# Altium PCB PCB_EXP_RS485_SENC_CON.PcbDoc
Units mm, origin at the board's own origin, x right, y up, seen from the top; angles counter-clockwise.
Board outline 35 x 22 mm, 2 copper layers (Top Layer, Bottom Layer), stack 1.671 mm thick; 1 components, 4 nets, 16 pads, 0 vias.
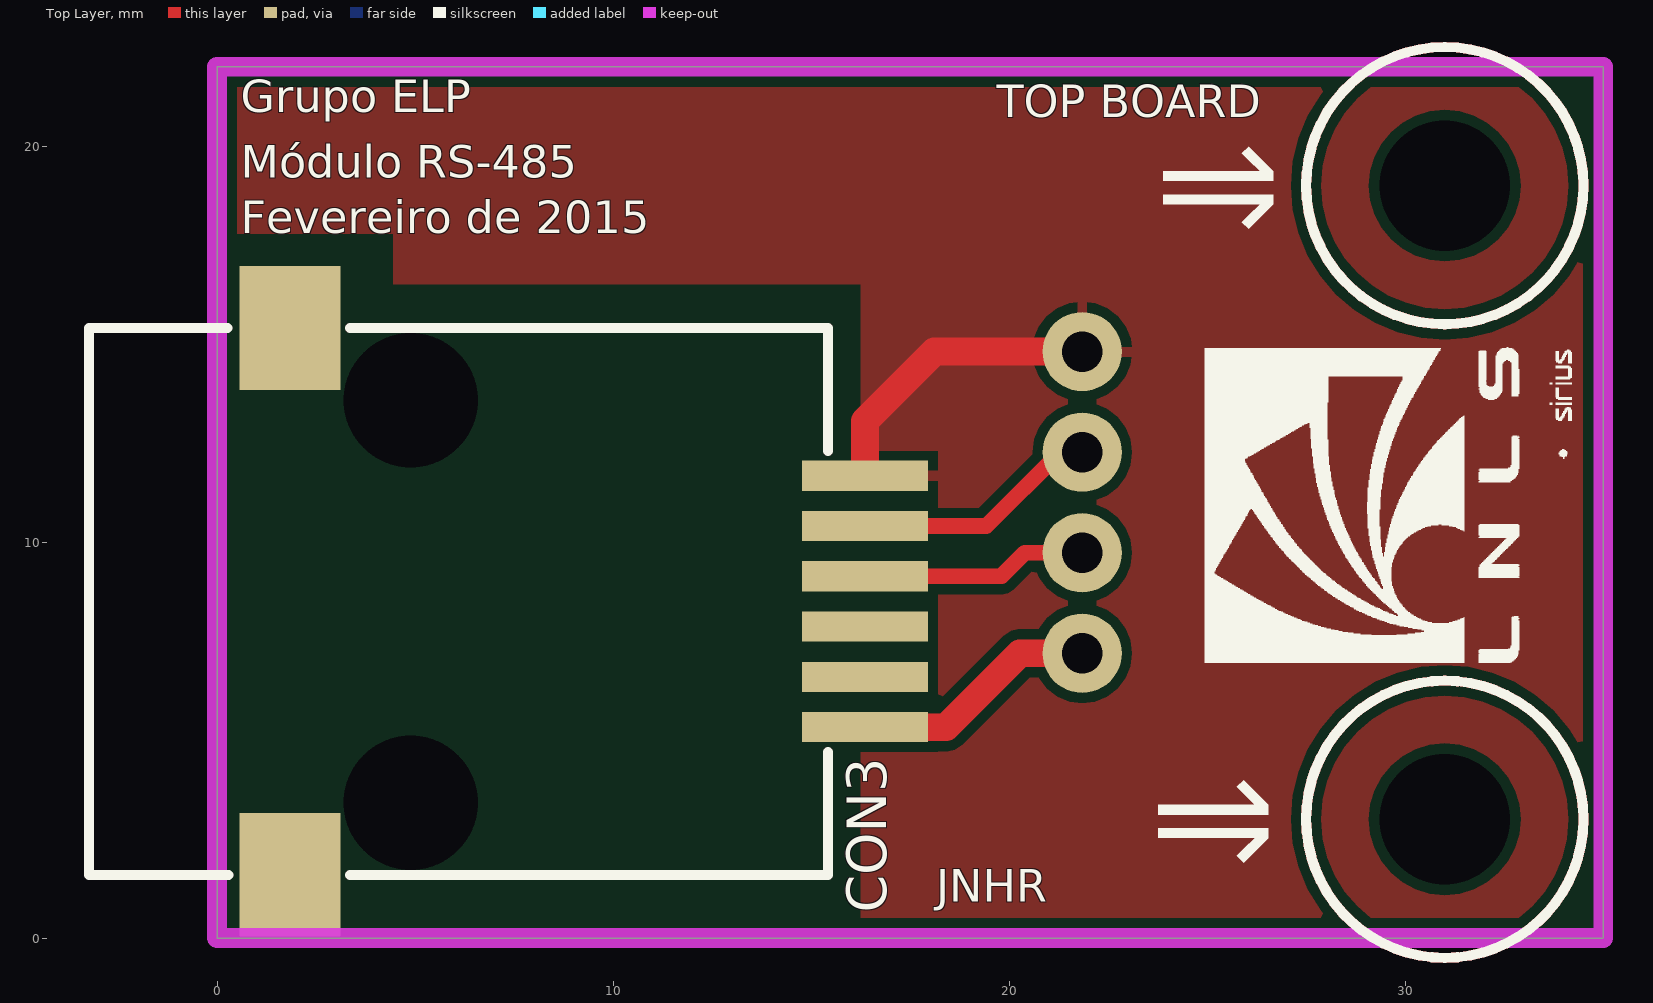
[diagram p0: Top Layer view]
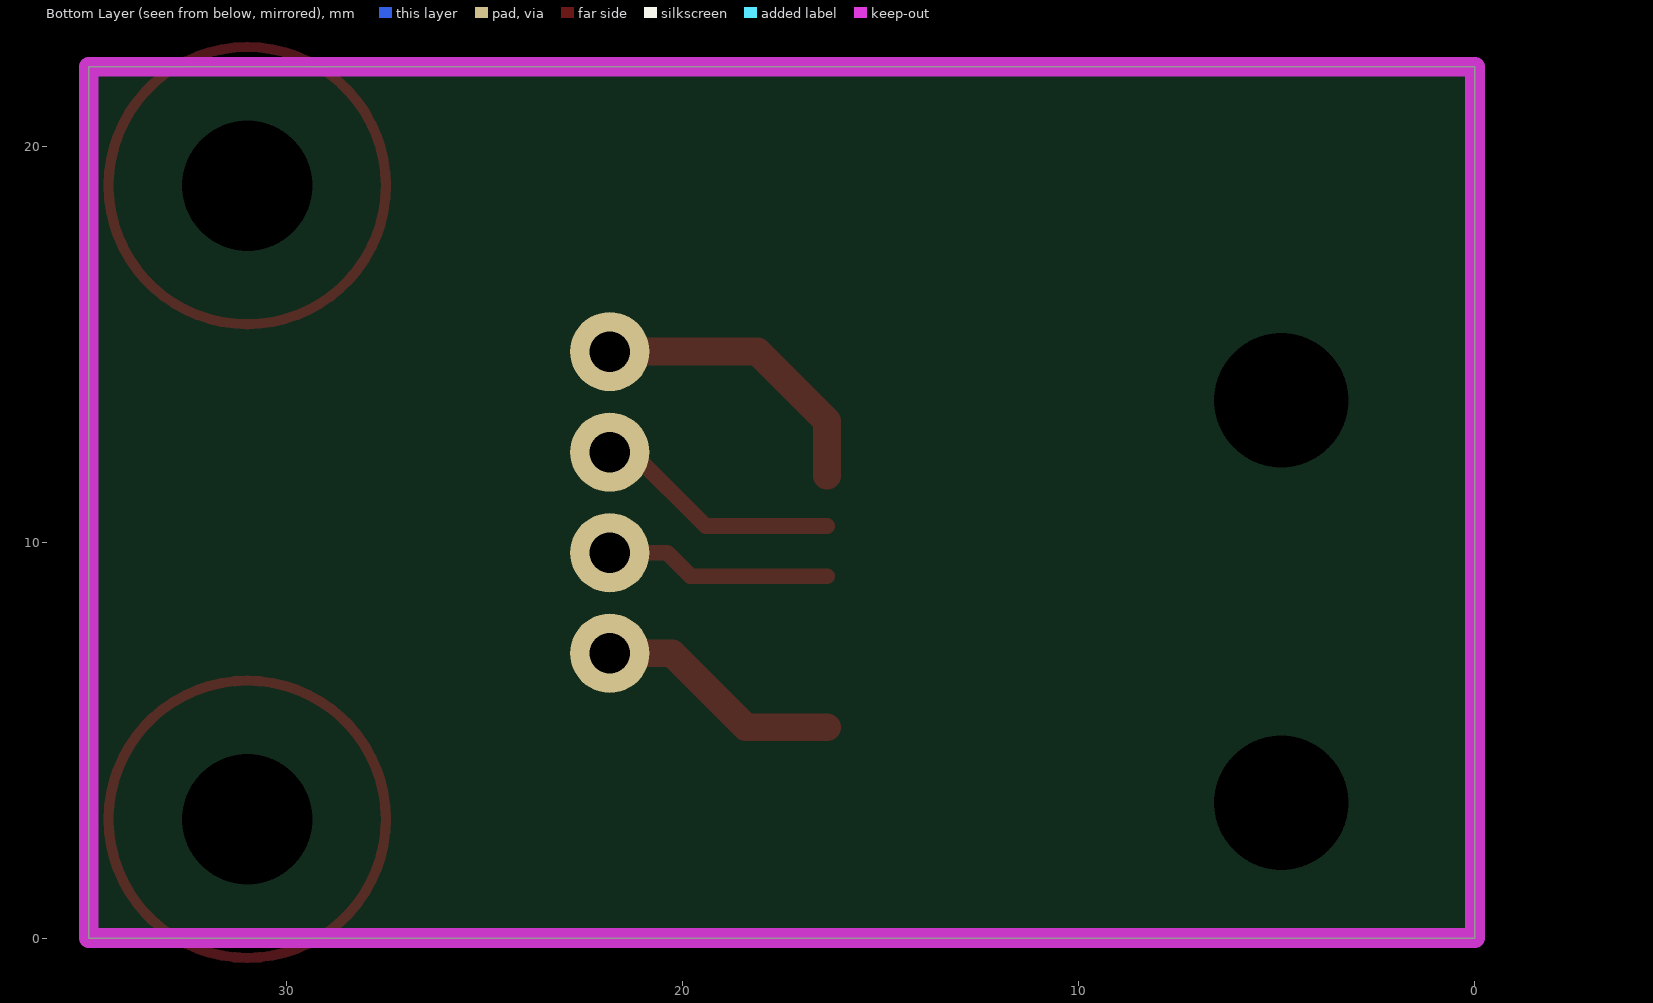
[diagram p1: Bottom Layer view, seen from below]

## Layer stack, top to bottom
Top Layer: signal copper 0.0356
Dielectric: core 1.6, FR-4, Dk 4.8
Bottom Layer: signal copper 0.0356

## Board outline
0,0 0,22 35,22 35,0

## Design rules (kind name [scope] priority, off if disabled: settings)
Clearance [All] p1: gap=0.254
PolygonConnect [All] p1: connectstyle=Relief reliefconductorwidth=0.254 reliefentries=4 polygonreliefangle="90 Angle" airgapwidth=0.254
RoutingVias [All] p1: holewidth=0.711 width=1.27 viastyle="Through Hole" minholewidth=0.711 minwidth=1.27 maxholewidth=0.711 maxwidth=1.27
SolderMaskExpansion [All] p1: expansion=0.102
Width [All] p1: maxlimit=1 minlimit=0.254 preferedwidth=0.254
28 further rules are at their usual default settings.

## Components (designator, comment, footprint, x,y, rotation, side; value= is the part's Value field where it differs from the comment)
CON3 "133719" "ERNI 133719" 9.1,8.5 r270 top locked

## Footprints (in the part's own frame and the unit in brackets; to place one, negate y for a bottom-side part, rotate by r counter-clockwise, add the part's x,y. Pads: shape width x height; smd on the part's side, far side on the other; paste and mask are expansions set on the pad)
"ERNI 133719" [mm] "RJ11 SMD com shield"
  rect 0.76x3.18 smd: 1(-3.175,7.26) 2(-1.905,7.26) 3(-0.635,7.26) 4(0.635,7.26) 5(1.905,7.26) 6(3.175,7.26)
  round 3.35 hole 3.4 unplated: S1(-5.08,-4.21) S1(5.08,-4.21)
  rect 3.12x2.54 smd: SH(-6.905,-7.26) SH(6.905,-7.26)
  silkscreen extent -6.9,-12.34 6.91,6.33, body extent -8.64,-12.34 8.69,8.63, height 13.79

## Part data
CON3: "Conector RJ11 SMD, Shielded, EMI Finger"

## Free pads (board coordinates)
  round 2 hole 1.02 unplated: 1(21.844,14.81) 2(21.844,12.27) 3(21.844,9.73) 4(21.844,7.19)
  round 0 hole 3.3 unplated: MEC(31,3) MEC(31,19)

## Nets (pads, with @x,y where several pads share a name; then routed paths per layer and width w, separated by ;. In a path a pad name is that pad's centre, name@x,y a point inside that pad or via, vN(x,y) a via of type N, cw(c..) or ccw(c..) an arc to the next point about the centre after c; other vN are vias at no path point)
GND_ISO: CON3.1 pad.1 | length 7.6
  Top Layer w0.7: CON3.1 16.36,13.058 18.112,14.81 pad.1
RS485_A: CON3.2 pad.2 | length 6.3
  Top Layer w0.4: CON3.2 19.422,10.405 21.287,12.27 pad.2
RS485_B: CON3.3 pad.3 | length 5.7
  Top Layer w0.4: CON3.3 19.803,9.135 20.398,9.73 pad.3
VDD5V_ISO: CON3.6 pad.4 | length 6.3
  Top Layer w0.7: CON3.6 18.406,5.325 20.271,7.19 pad.4
pads on no net: CON3.4 CON3.5 CON3.S1 CON3.SH
copper on no net: | length 44
  Top Layer w0.254: 34.5,3 ccw(c31,3) 34.5,3 ; 34.5,19 ccw(c31,19) 34.5,19

## Polygon pours and split planes (outlines as drawn)
GND_ISO on Top Layer "Mechanical 14-No Net" (solid): 0,22 0,17.78 3.81,17.78 4.445,17.78 4.445,16.51 16.256,16.51 16.256,9.906 16.256,0 35,0 35,22

## Keep-outs
Keep-Out Layer:
  the board outline again, w0.5

## Silkscreen, mask and mechanical layers (free items; w line width, h text height)
Top Overlay:
  drawing of 24 lines, arcs and shapes, not listed
  text "Grupo ELP" at 0.59,20.574 h1.4
  text "TOP BOARD" at 19.685,20.447 h1.4
  text "Módulo RS-485" at 0.59,18.923 h1.4
  text "Fevereiro de 2015" at 0.59,17.526 h1.4
  text "JNHR" at 18.161,0.635 h1.4
Bottom Overlay:
  text "JNHR" at 92.456,27.813 h1.4